# Altium PCB Main.PcbDoc (part 1 of 2)
Units mm, origin at the board's own origin, x right, y up, seen from the top; angles counter-clockwise.
Board outline 184.78 x 184.78 mm, 2 copper layers (Top Layer, Bottom Layer); 86 components, 58 nets, 400 pads, 1067 vias.
Unrouted connection lines stored in the file: 51.
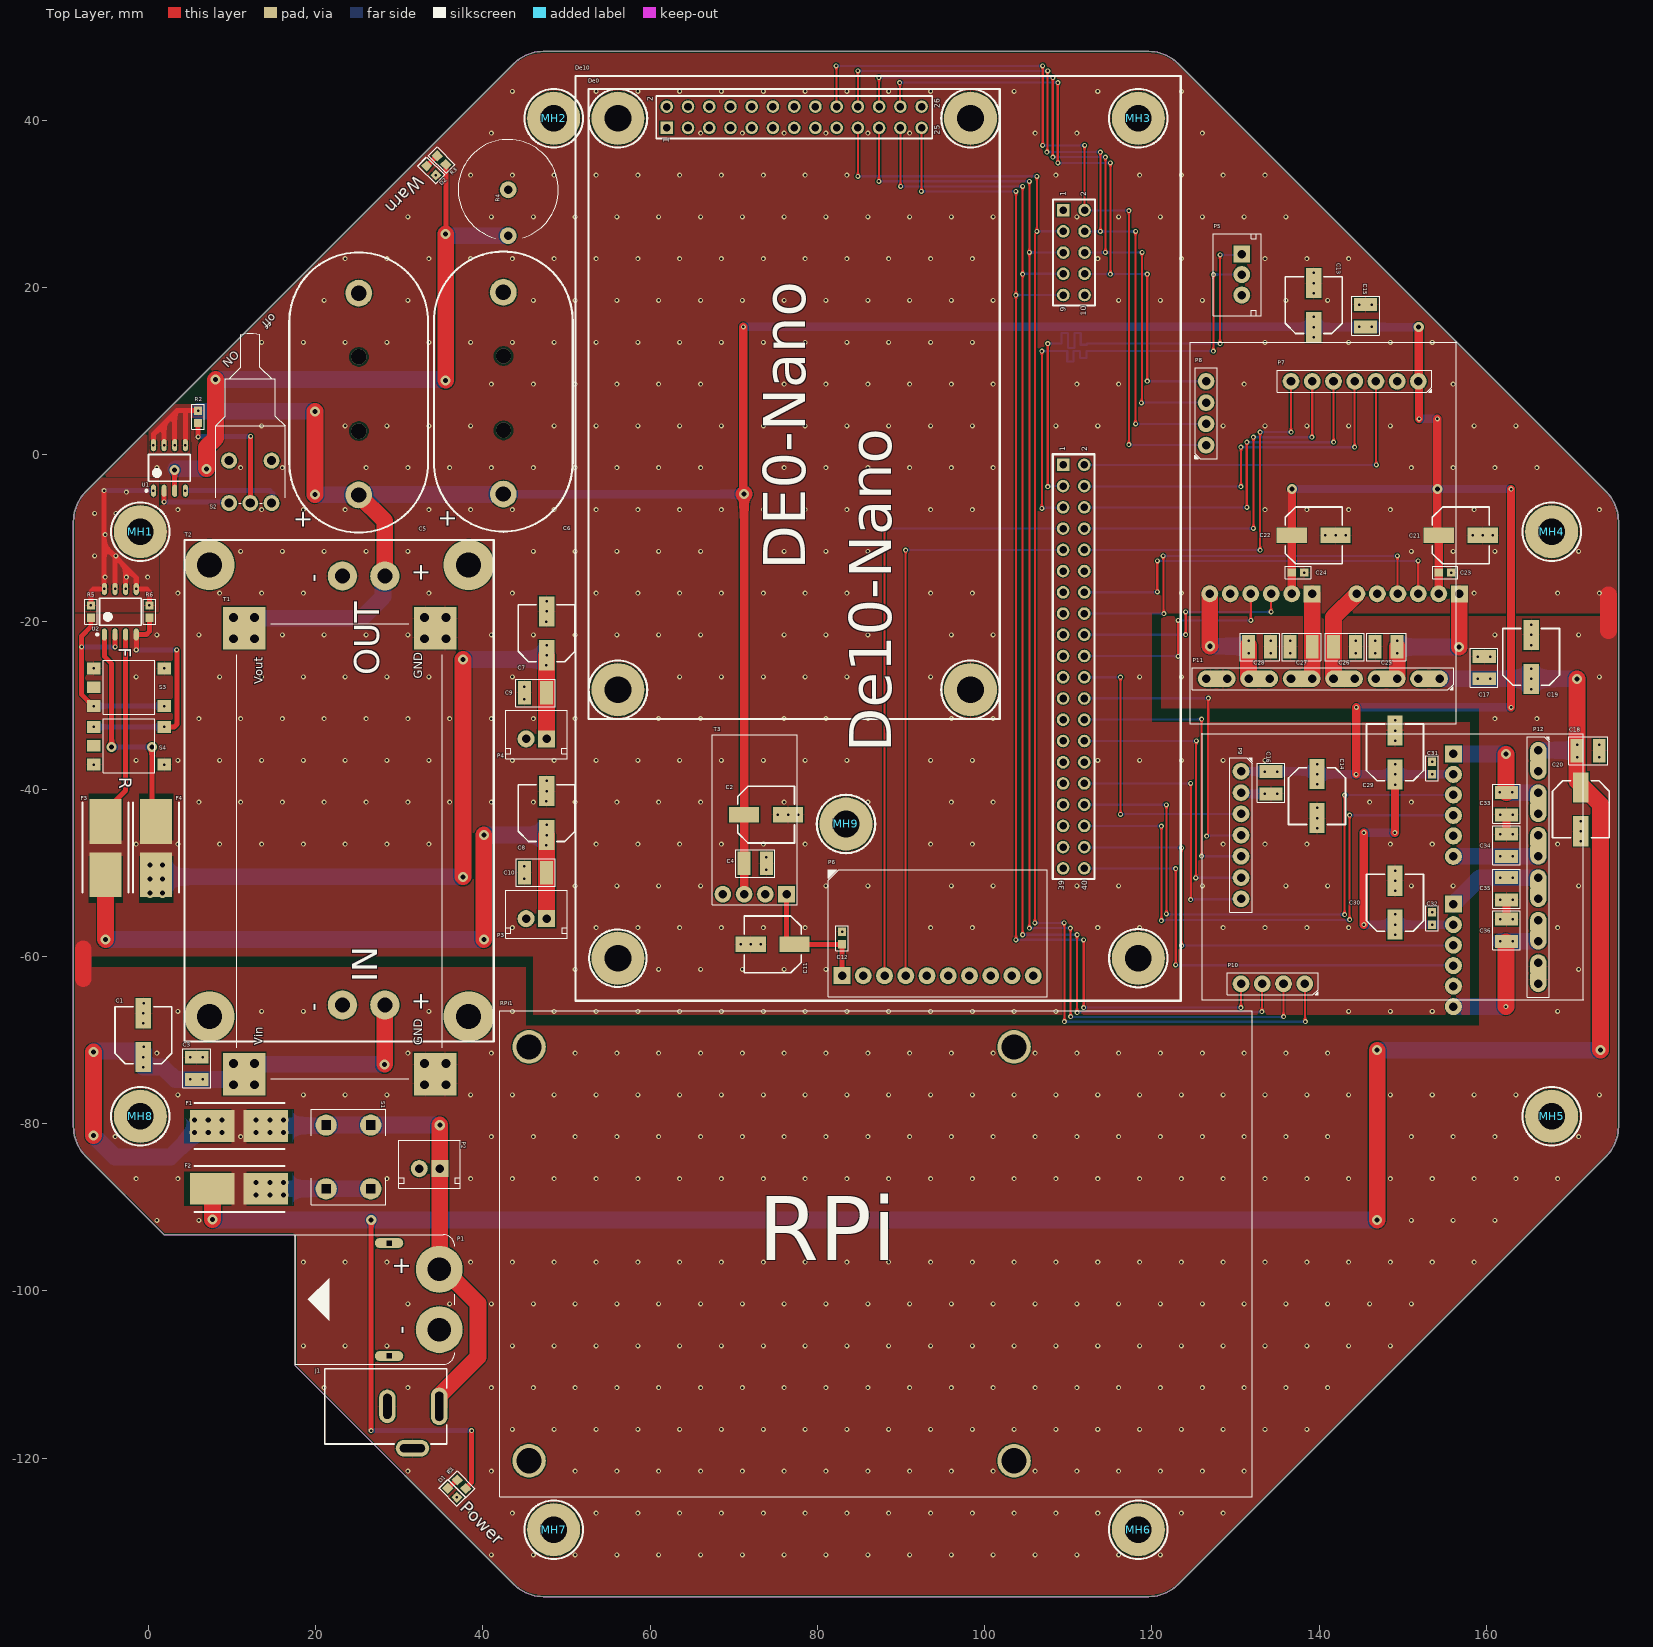
[diagram p0: Top Layer view]
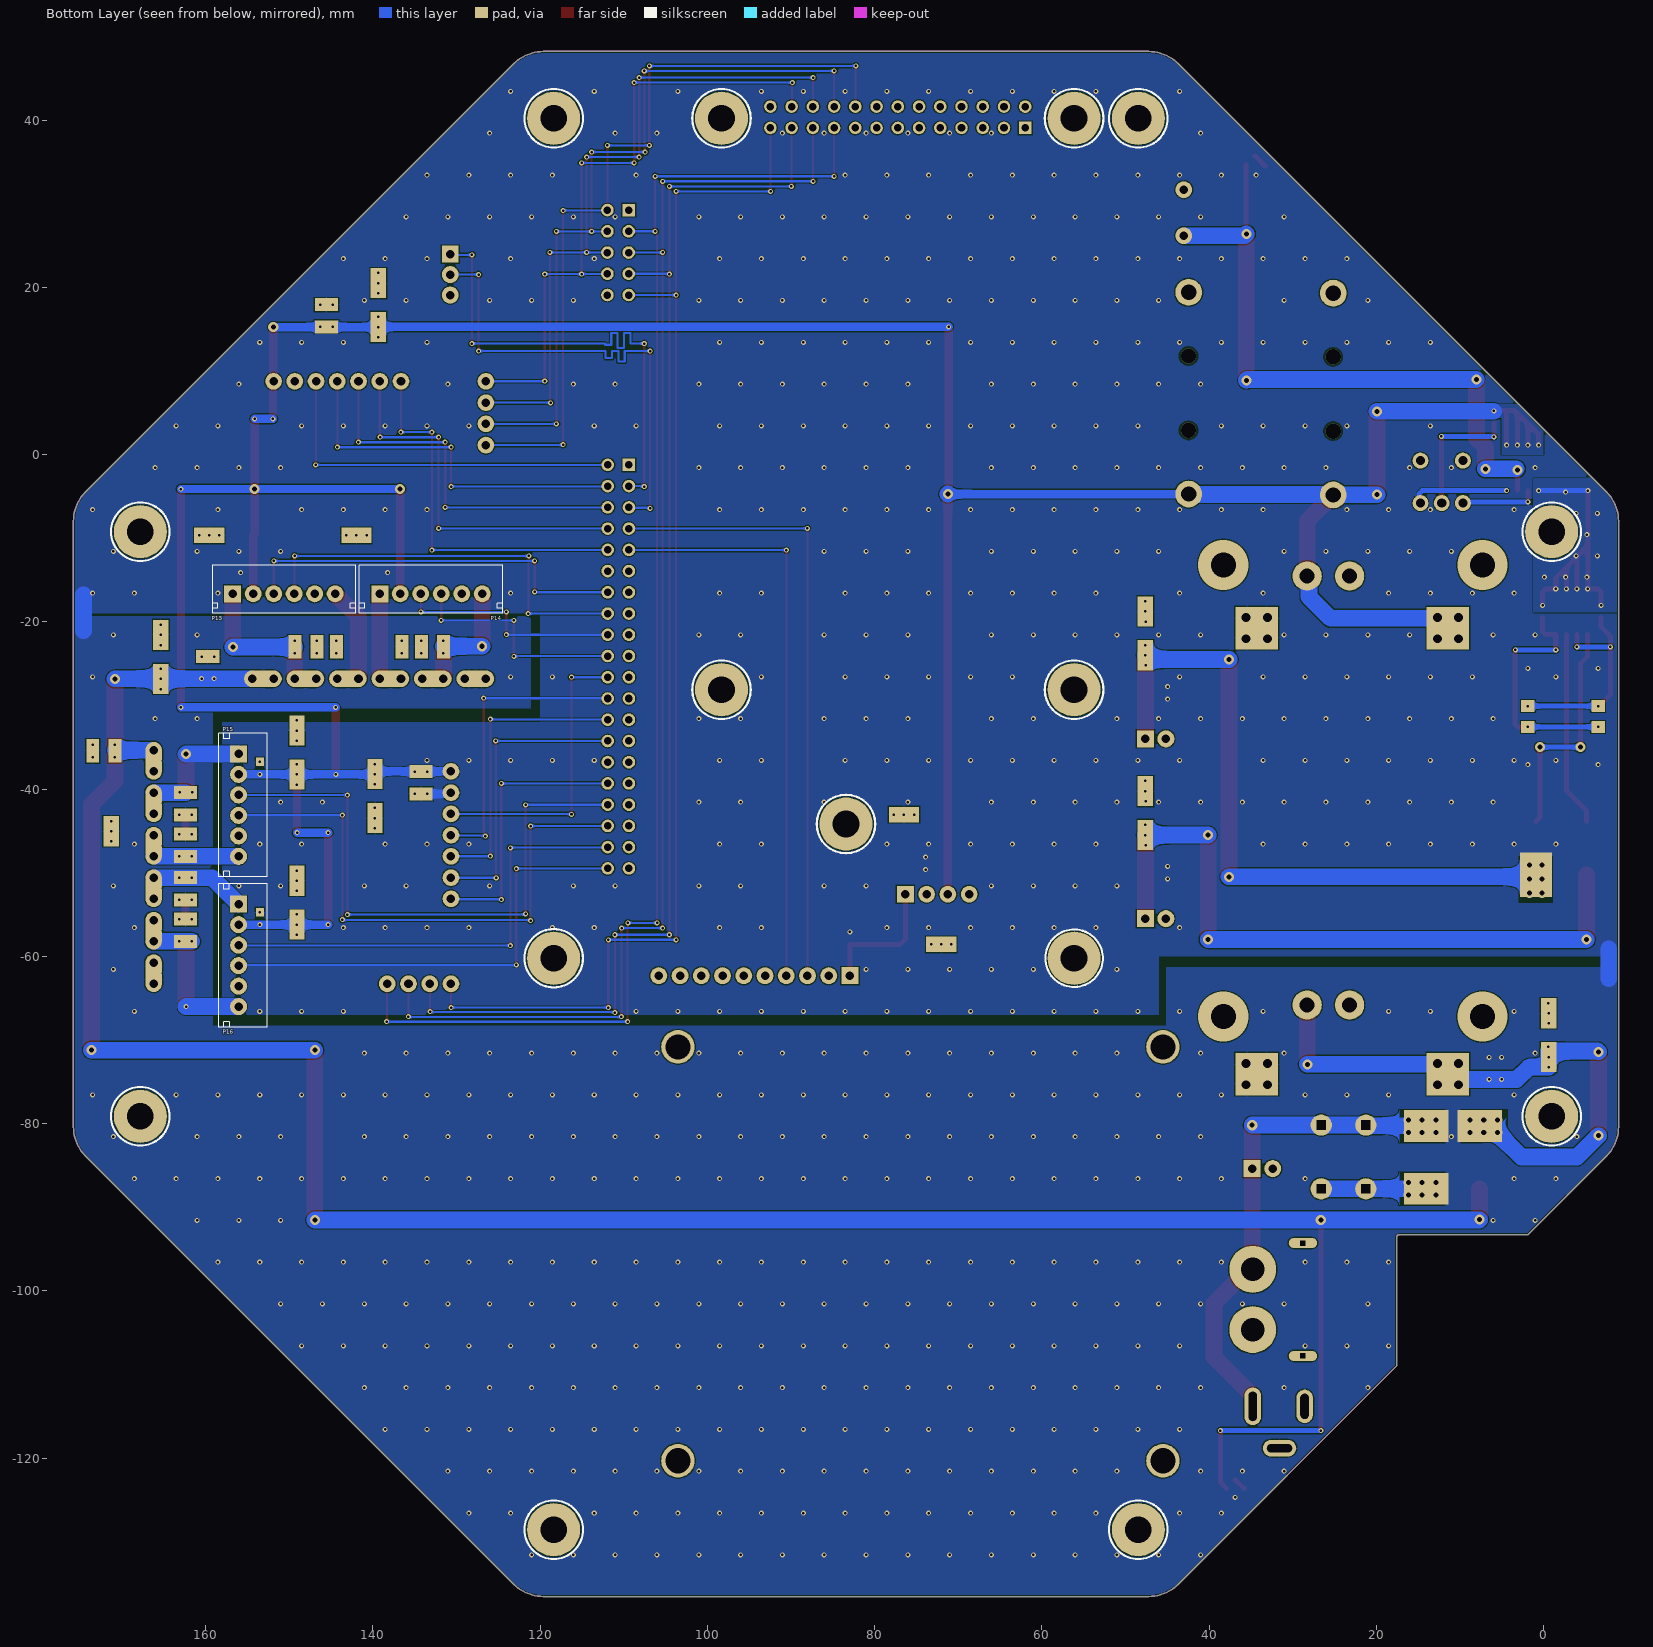
[diagram p1: Bottom Layer view, seen from below]
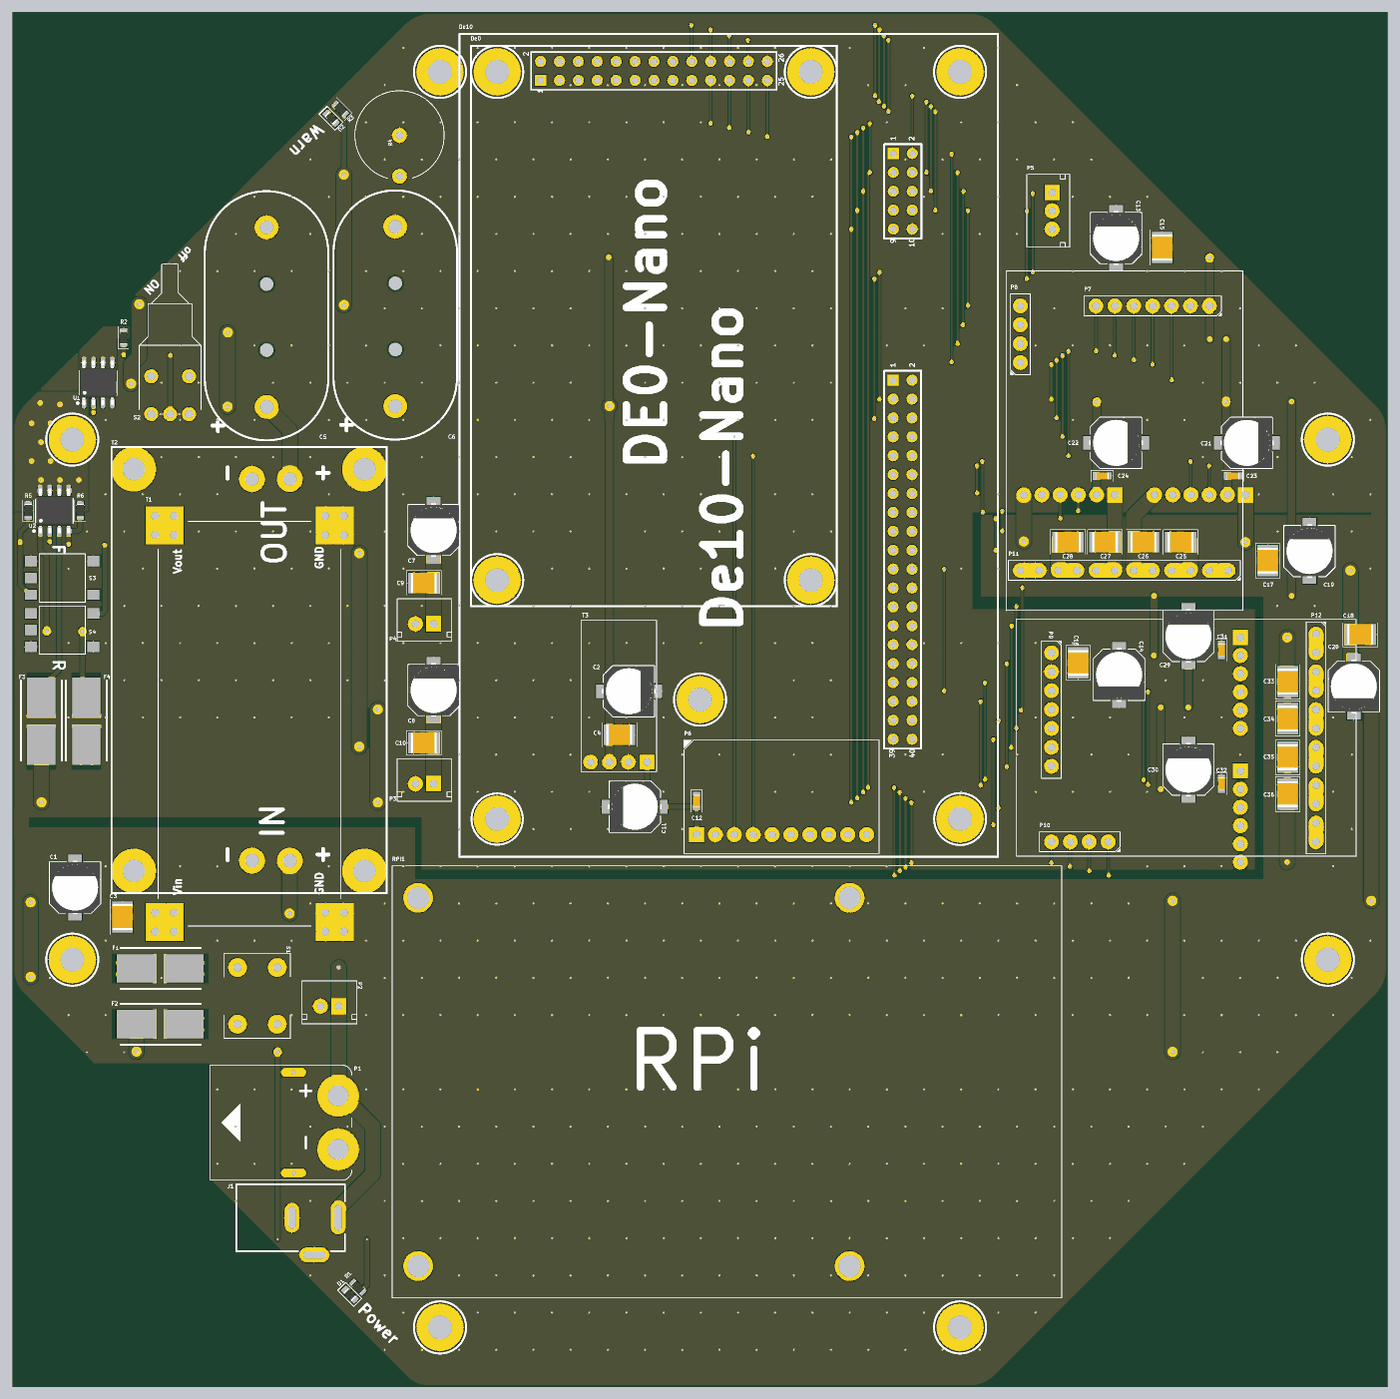
[diagram p3: 3D render of the assembled board from above, using the file's embedded part models]

## Layer stack, top to bottom
Top Solder: solder mask 0.0102, Solder Resist, Dk 3.5
Top Layer: signal copper 0.0356
Dielectric 1: dielectric 0.32, FR-4, Dk 4.8
Bottom Layer: signal copper 0.0356
Bottom Solder: solder mask 0.0102, Solder Resist, Dk 3.5

## Board outline
1.867,-93.289 17.242,-93.289 cw(c17.242,-93.614) 17.567,-93.614 17.567,-108.995 43.676,-135.104 ccw(c47.212,-131.569) 47.212,-136.569 119.607,-136.569 ccw(c119.607,-131.569) 123.142,-135.104 174.333,-83.914 ccw(c170.797,-80.378) 175.797,-80.378 175.797,-7.983 ccw(c170.797,-7.983) 174.333,-4.448 123.142,46.743 ccw(c119.607,43.207) 119.607,48.207 47.212,48.207 ccw(c47.212,43.207) 43.676,46.743 -7.514,-4.448 ccw(c-3.979,-7.983) -8.979,-7.983 -8.979,-80.378 ccw(c-3.979,-80.378) -7.514,-83.914

## Design rules (kind name [scope] priority, off if disabled: settings)
BoardOutlineClearance [All] p1: gap=0.2 ignorepadtopadclearanceinfootprint=FALSE
Clearance [All] p1: gap=0.127 ignorepadtopadclearanceinfootprint=FALSE except(0.25: Arc-Hole Track-Hole SMDPad-Hole THPad-Hole Via-Hole Fill-Hole Poly-Hole Region-Hole Text-Hole)
ComponentClearance [All] p1 off: gap=0.127 collisioncheckmode=3 verticalgap=0.127 showdistances=TRUE
DiffPairsRouting [All] p1: maxlimit=0.254 minlimit=0.127 mostfreqgap=0.127 toplayer_minwidth=0.127 toplayer_maxwidth=25.4 toplayer_prefwidth=0.127 bottomlayer_minwidth=0.127 bottomlayer_maxwidth=25.4 bottomlayer_prefwidth=0.127 maxuncoupledlength=12.7
Height [All] p1: minheight=0 maxheight=1816.048 prefheight=12.7
HoleSize [All] p1: absolutevalues=TRUE maxlimit=6.3 minlimit=0.3 maxpercent=80.000 minpercent=20.000
HoleToHoleClearance [All] p1: gap=0.25 allowstackedmicrovias=FALSE
Length "Schematic Length Constraint" [InNet('UART_RX')] p1: maxlimit=61 minlimit=60
Length [InNetClass('UART')] p2: maxlimit=60.1 minlimit=60
MinimumAnnularRing [All] p1: minimumring=0.076
MinimumSolderMaskSliver [All] p1: minsoldermaskwidth=0
PlaneClearance [All] p1: clearance=0.127
PlaneConnect PlaneConnectPowerPads [InPadClass('PowerPads')] p1: planeconnectstyle=Direct reliefexpansion=0.508 reliefentries=4 reliefconductorwidth=0.254 reliefairgap=0.254
PlaneConnect [All] p2: pad.planeconnectstyle=Relief pad.reliefexpansion=0.3 pad.reliefentries=4 pad.reliefconductorwidth=0.127 pad.reliefairgap=0.127 via.planeconnectstyle=Direct via.reliefexpansion=0.3 via.reliefentries=4 via.reliefconductorwidth=0.127 via.reliefairgap=0.127
PolygonConnect PolygonConnectPowerPads [All vs (InPadClass('PowerPads'))] p1: connectstyle=Direct reliefconductorwidth=0.254 reliefentries=4 polygonreliefangle="90 Angle" airgapwidth=0.254
PolygonConnect [All] p2: thpad.connectstyle=Relief thpad.reliefconductorwidth=0.127 thpad.reliefentries=4 thpad.polygonreliefangle="90 Angle" thpad.airgapwidth=0.127 smdpad.connectstyle=Relief smdpad.reliefconductorwidth=0.127 smdpad.reliefentries=4 smdpad.polygonreliefangle="90 Angle" smdpad.airgapwidth=0.127 via.connectstyle=Direct via.reliefconductorwidth=0.127 via.reliefentries=4 via.polygonreliefangle="90 Angle" via.airgapwidth=0.127
RoutingVias [All] p1: holewidth=0.3 width=0.6 viastyle="Through Hole" minholewidth=0.3 minwidth=0.6 maxholewidth=0.6 maxwidth=6.6
SilkToSilkClearance [All] p1: silktosilkclearance=0
SilkToSolderMaskClearance [IsPad] p1 off: minsilkscreentomaskgap=0.127 clearancetoexposedcopper=TRUE
SolderMaskExpansion [All] p1: expansion=0.075 istentingtop=FALSE
Width [All] p1: maxlimit=25.4 minlimit=0.127 preferedwidth=0.127 minimp=50.000000 maximp=50.000000 favimp=50.000000
20 further rules are at their usual default settings.

## Classes and differential pairs
net class UART: UART_RX UART_TX
component class Power: C1 C2 C3 C4 C5 C6 C7 C8 C9 C10 D1 D2 F1 F2 F3 F4 J1 MH1 MH2 MH3 MH4 MH5 MH6 MH7 MH8 MH9 P1 P2 P3 P4 R1 R2 R3 R4 R5 R6 S1 S2 S3 S4 T1 T2 T3 U1 U2
component class Motor: C13 C14 C15 C16 C17 C18 C19 C20 C21 C22 C23 C24 C25 C26 C27 C28 C29 C30 C31 C32 C33 C34 C35 C36 P7 P8 P9 P10 P11 P12 P13 P14 P15 P16
component class IOandCommunication: C11 C12 De0 De10 P5 P6 RPi1

## Components (designator, comment, footprint, x,y, rotation, side; value= is the part's Value field where it differs from the comment)
C1 "220uF" VZT221M1ETR-0607 -0.603,-69.434 r90 top
C2 "220uF" VZT221M1ETR-0607 73.85,-43.05 r0 top
C3 "0.1uF" 1210B104K500NT 5.765,-73.4 r270 top
C4 "0.1uF" 1210B104K500NT 72.55,-48.892 r180 top
C5 "10F" SUPPYCAP-DIP_L33.0_W16.5 25.135,-1.025 r90 top
C6 "10F" SUPPYCAP-DIP_L33.0_W16.5 42.435,-0.925 r90 top
C7 "220uF" VZT221M1ETR-0607 47.6,-21.375 r90 top
C8 "220uF" VZT221M1ETR-0607 47.6,-42.875 r90 top
C9 "0.1uF" 1210B104K500NT 46.275,-28.5 r0 top
C10 "0.1uF" 1210B104K500NT 46.275,-50 r0 top
C11 "220uF" VZT221M1ETR-0607 74.64,-58.575 r180 top
C12 "0.1uF" CL10B104KA8NNNC 82.935,-57.825 r270 top
C13 "220uF" VZT221M1ETR-0607 139.335,17.875 r90 top
C14 "220uF" VZT221M1ETR-0607 139.735,-40.85 r270 top
C15 "0.1uF" 1210B104K500NT 145.535,16.6 r270 top
C16 "0.1uF" 1210B104K500NT 134.235,-39.25 r90 top
C17 "0.1uF" 1210B104K500NT 159.715,-25.485 r270 top
C18 "0.1uF" 1210B104K500NT 172.16,-35.425 r180 top
C19 "220uF" VZT221M1ETR-0607 165.335,-24.2 r90 top
C20 "220uF" VZT221M1ETR-0607 171.287,-42.423 r270 top
C21 "220uF" VZT221M1ETR-0607 156.924,-9.665 r0 top
C22 "220uF" VZT221M1ETR-0607 139.34,-9.665 r0 top
C23 "0.1uF" CL10B104KA8NNNC 155.049,-14.11 r180 top
C24 "0.1uF" CL10B104KA8NNNC 137.465,-14.11 r180 top
C25 "0.1uF" 1210B104K500NT 148,-23 r180 top
C26 "0.1uF" 1210B104K500NT 143.03,-23 r180 top
C27 "0.1uF" 1210B104K500NT 137.84,-23 r180 top
C28 "0.1uF" 1210B104K500NT 132.87,-23 r180 top
C29 "220uF" VZT221M1ETR-0607 149.062,-35.628 r90 top
C30 "220uF" VZT221M1ETR-0607 149.062,-53.593 r90 top
C31 "0.1uF" CL10B104KA8NNNC 153.507,-37.503 r270 top
C32 "0.1uF" CL10B104KA8NNNC 153.507,-55.468 r270 top
C33 "0.1uF" 1210B104K500NT 162.397,-41.758 r270 top
C34 "0.1uF" 1210B104K500NT 162.397,-46.728 r270 top
C35 "0.1uF" 1210B104K500NT 162.397,-51.918 r270 top
C36 "0.1uF" 1210B104K500NT 162.397,-56.888 r270 top
D1 "LED(G)" BL-HG036D-AV-TRB 35.802,-122.572 r315 top
D2 "LED(G)" BL-HG036D-AV-TRB 33.278,35.559 r315 top
De0 "DE0-Nano" DE0-NANO 93.726,40.334 r90 top locked
De10 "De10-Nano" DE10-NANO 110.664,19.077 r90 top locked
F1 "5A Fuse Holder" "SMD FUSES HOLDER" 10.827,-80.314 r180 top
F2 "10A Fuse Holder" "SMD FUSES HOLDER" 10.827,-87.807 r180 top
F3 "4A Fuse Holder" "SMD FUSES HOLDER" -5.135,-47.075 r270 top
F4 "4A Fuse Holder" "SMD FUSES HOLDER" 0.915,-47.075 r270 top
J1 "DC-005-T25" DC-005-T25 26.66,-114.73 r0 top
MH1 "M3 Hole" "M3 HOLE" -0.979,-9.226 r0 top locked
MH2 "M3 Hole" "M3 HOLE" 48.455,40.207 r0 top
MH3 "M3 Hole" "M3 HOLE" 118.364,40.207 r0 top
MH4 "M3 Hole" "M3 HOLE" 167.797,-9.226 r0 top
MH5 "M3 Hole" "M3 HOLE" 167.797,-79.135 r0 top
MH6 "M3 Hole" "M3 HOLE" 118.364,-128.569 r0 top
MH7 "M3 Hole" "M3 HOLE" 48.455,-128.569 r0 top
MH8 "M3 Hole" "M3 HOLE" -0.979,-79.135 r0 top
MH9 "M3 Hole" "M3 HOLE" 83.409,-44.181 r0 top
P1 "Header 2" XT60PW-F 31.767,-101.039 r90 top
P2 "Header 2" B2B-XH-A(LF)(SN) 37.28,-81.994 r180 top
P3 "Header 2" B2B-XH-A(LF)(SN) 50.05,-52.1 r180 top
P4 "Header 2" B2B-XH-A(LF)(SN) 50.05,-30.6 r180 top
P5 "Header 3" B3B-XH-A(LF)(SN) 131.61,25.075 r270 top
P6 "MPU9250" MPU9250 81.265,-49.625 r90 top
P7 "Header 7" KH-2.54FH-1X7P-H8.5 132.465,8.75 r180 top
P8 "Header 4" KH-2.54FH-1X4P-H8.5 126.465,10.37 r90 top
P9 "Header 7" KH-2.54FH-1X7P-H8.5 130.647,-57.293 r270 top
P10 "Header 4" KH-2.54FH-1X4P-H8.5 129.027,-63.293 r180 top
P11 "Header 12" "KH-2.54FH-1X12P-H8.5 (PAD LINKED)" 154.405,-26.81 r180 top
P12 "Header 12" "KH-2.54FH-1X12P-H8.5 (PAD LINKED)" 166.207,-35.353 r270 top
P13 "Header 6" B6B-XH-A(LF)(SN) 156.749,-16.65 r180 bottom
P14 "Header 6" B6B-XH-A(LF)(SN) 139.165,-16.65 r180 bottom
P15 "Header 6" B6B-XH-A(LF)(SN) 156.047,-35.803 r270 bottom
P16 "Header 6" B6B-XH-A(LF)(SN) 156.047,-53.768 r270 bottom
R1 "150k" RS-03K1503FT 37.428,-123.138 r315 top
R2 "1k" RS-03K1503FT 5.935,4.5 r90 top
R3 "150k" RS-03K1503FT 35.045,35.205 r315 top
R4 "12" MOF3WS-12Ω±5%T 43.015,31.675 r270 top
R5 "1k" RS-03K1503FT -6.9,-18.775 r90 top
R6 "1k" RS-03K1503FT 0.1,-18.775 r90 top
RPi1 "Rasbperry PI 4" "RASPBERRY PI 4" 74.515,-95.575 r180 top
S1 "Motor EMS" JNQ032 26.575,-87.807 r270 top
S2 "Digital EMS" ST-0-102-C03-N003-RS 12.175,9.045 r270 top
S3 "FPGA_Re" SKHMQLE010 -2.335,-27.825 r180 top
S4 "RPi_Re" SKHMQKE010 -2.335,-34.825 r180 top
T1 "XL4015 Module" "XL4015 VOLTAGE REGULATOR MODULE" 12.695,-72.825 r90 top locked
T2 "XL4016 Module" "XH-M401 VOLTAGE REGULATOR MODULE" 26.365,9.375 r90 top locked
T3 "3P3 Voltage regulator" "SMALL VOLTAGE REGULATOR MODULE" 77.575,-53.845 r180 top
U1 "HSM3214" HSM3214 2.5,-1.6 r90 top
U2 "HSM3214" HSM3214 -3.37,-18.8 r90 top

## Footprints (in the part's own frame and the unit in brackets; to place one, negate y for a bottom-side part, rotate by r counter-clockwise, add the part's x,y. Pads: shape width x height; smd on the part's side, far side on the other; paste and mask are expansions set on the pad)
1210B104K500NT [mm] "50V 100nF X7R ±10% 1210  Multilayer Ceramic Capacitors MLCC - SMD/SMT ROHS"
  rect 1.55x2.8 smd: 1(-1.325,0) 2(1.325,0)
  silkscreen extent -2.35,-1.65 2.35,1.65, body extent -1.75,-1.4 1.75,1.4, height 2.8
B2B-XH-A(LF)(SN) [mil] "1x2P XH Header, Top Vesion"
  rect 80x80 hole 40: 1(96.46,133.86)
  round 80 hole 40: 2(192.91,133.86)
  silkscreen extent 0,0 289,226
B3B-XH-A(LF)(SN) [mil] "1x3P XH Header, Top Vesion"
  rect 80x80 hole 40: 1(43.31,-34.45)
  round 80 hole 40: 2(139.76,-34.45) 3(236.22,-34.45)
  silkscreen extent -53,-168 333,58
B6B-XH-A(LF)(SN) [mil] "1x6P XH 1 2.5mm 6 Brass Plugin,P=2.5mm  Wire To Board / Wire To Wire Connector ROHS"
  rect 80x80 hole 40: 1(0,0)
  round 80 hole 40: 2(96.46,0) 3(192.91,0) 4(289.37,0) 5(385.83,0) 6(482.28,0)
  silkscreen extent -96,-93 579,134
BL-HG036D-AV-TRB [mm] "0603 SMD LED(G)"
  rect 0.95x0.95 smd: 1(0.725,-0.75) 2(2.275,-0.75)
  silkscreen extent -0.06,-1.5 3,0, body extent 0.65,-1.2 2.35,-0.3, height 0.9
CL10B104KA8NNNC [mm] "0603 25V 100nF MLCC"
  rect 1x0.95 smd: 1(-0.75,0) 2(0.75,0)
  silkscreen extent -1.5,-0.75 1.5,0.75, body extent -0.85,-0.45 0.85,0.45, height 0.55
DC-005-T25 [mm] "30V 3A 2.5mm Power Connector"
  oval 2x4.5 hole 1 slot 3.5 at 90 deg: 1(8.105,0.905)
  oval 2x4 hole 1 slot 3 at 90 deg: 2(1.905,0.905)
  oval 4x2 hole 1 slot 3 at 0 deg: 3(4.905,-4.095)
  silkscreen extent -5.6,-3.6 9.01,5.41
DE0-NANO [mm]
  round 6.35 hole 3.2: 0(-68.453,-4.572) 0(-68.453,37.592) 0(-0.127,-4.572) 0(-0.127,37.592)
  rect 1.5x1.5 hole 0.9: 1(-1.27,31.75)
  round 1.5 hole 0.9: 2(1.27,31.75) 3(-1.27,29.21) 4(1.27,29.21) 5(-1.27,26.67) 6(1.27,26.67) 7(-1.27,24.13) 8(1.27,24.13) 9(-1.27,21.59) 10(1.27,21.59) 11(-1.27,19.05) 12(1.27,19.05) 13(-1.27,16.51) 14(1.27,16.51) 15(-1.27,13.97) 16(1.27,13.97) 17(-1.27,11.43) 18(1.27,11.43) 19(-1.27,8.89) 20(1.27,8.89) 21(-1.27,6.35) 22(1.27,6.35) 23(-1.27,3.81) 24(1.27,3.81) 25(-1.27,1.27) 26(1.27,1.27)
  silkscreen extent -71.96,-8.08 3.38,41.1
DE10-NANO [mm]
  round 6.35 hole 3.2: 0(-79.31,-7.7) 0(-79.31,54.53) 0(21.13,54.53) 0(21.13,-7.7)
  rect 1.5x1.5 hole 0.9: 1(10.16,1.27) 11(-20.31,1.3)
  round 1.5 hole 0.9: 2(10.16,-1.27) 3(7.62,1.27) 4(7.62,-1.27) 5(5.08,1.27) 6(5.08,-1.27) 7(2.54,1.27) 8(2.54,-1.27) 9(0,1.27) 10(0,-1.27) 12(-20.31,-1.24) 13(-22.85,1.3) 14(-22.85,-1.24) 15(-25.39,1.3) 16(-25.39,-1.24) 17(-27.93,1.3) 18(-27.93,-1.24) 19(-30.47,1.3) 20(-30.47,-1.24) 21(-33.01,1.3) 22(-33.01,-1.24) 23(-35.55,1.3) 24(-35.55,-1.24) 25(-38.09,1.3) 26(-38.09,-1.24) 27(-40.63,1.3) 28(-40.63,-1.24) 29(-43.17,1.3) 30(-43.17,-1.24) 31(-45.71,1.3) 32(-45.71,-1.24) 33(-48.25,1.3) 34(-48.25,-1.24) 35(-50.79,1.3) 36(-50.79,-1.24) 37(-53.33,1.3) 38(-53.33,-1.24) 39(-55.87,1.3) 40(-55.87,-1.24) 41(-58.41,1.3) 42(-58.41,-1.24) 43(-60.95,1.3) 44(-60.95,-1.24) 45(-63.49,1.3) 46(-63.49,-1.24) 47(-66.03,1.3) 48(-66.03,-1.24) 49(-68.57,1.3) 50(-68.57,-1.24)
  silkscreen extent -84.39,-12.78 26.21,59.61
HSM3214 [mm] "30V 10A 12mΩ@10V,8A 1.5W 2.5V@250μA 2 N-Channel SOP-8  MOSFETs ROHS"
  oval 1.45x0.6 smd: 1(-2.725,1.905) 2(-2.725,0.635) 3(-2.725,-0.635) 4(-2.725,-1.905) 5(2.725,-1.905) 6(2.725,-0.635) 7(2.725,0.635) 8(2.725,1.905)
  silkscreen extent -2.85,-2.5 1.6,2.88, body extent -3,-2.5 3,2.5, height 1.75
JNQ032 [mm] "30A 4.8mm Short Connection"
  round 2.54 hole 1.1 square: 1(-7.62,0) 1(-7.62,-5.334) 2(0,0) 2(0,-5.334)
  silkscreen extent -9.53,-7.11 1.91,1.78, body extent -9.14,-6.86 1.52,1.52, height 8.8
KH-2.54FH-1X4P-H8.5 [mm] "1x4P Female Headers"
  round 2 hole 1.02: 1(-9.24,0) 2(-6.7,0) 3(-4.16,0) 4(-1.62,0)
  silkscreen extent -10.86,-1.33 0,1.33, body extent -10.89,-1.34 0,1.32, height 8.65
KH-2.54FH-1X7P-H8.5 [mm] "1x7P Female Headers"
  round 2 hole 1.02: 1(-19.4,0) 2(-16.86,0) 3(-14.32,0) 4(-11.78,0) 5(-9.24,0) 6(-6.7,0) 7(-4.16,0)
  silkscreen extent -21.02,-1.33 -2.54,1.33, body extent -21.05,-1.34 -2.54,1.32, height 8.65
"KH-2.54FH-1X12P-H8.5 (PAD LINKED)" [mm] "Two Pad Linked, 1x12P Female Headers"
  oval 3x2 hole 1.02 copper offset 0.51,0: 1(0,0) 3(5.08,0) 5(10.16,0) 7(15.24,0) 9(20.32,0) 11(25.4,0)
  oval 3x2 hole 1.02 copper offset -0.51,0: 2(2.54,0) 4(7.62,0) 6(12.7,0) 8(17.78,0) 10(22.86,0) 12(27.94,0)
  silkscreen extent -1.62,-1.33 29.56,1.33, body extent -1.65,-1.34 29.56,1.33, height 8.65
"M3 HOLE" [mm] "M3 Hole"
  round 6.35 hole 3.2: 1(0,0)
  silkscreen extent -3.5,-3.5 3.5,3.5
MOF3WS-12Ω±5%T [mm] "12Ω 3W Resistor"
  round 2 hole 1: 1(0,0) 2(5.5,0)
  silkscreen extent -6,-6 5.79,6
MPU9250 [mil] "MPU9250"
  rect 80x80 hole 40: 1(-500,-65.75)
  round 80 hole 40: 2(-500,-165.75) 3(-500,-265.75) 4(-500,-365.75) 5(-500,-465.75) 6(-500,-565.75) 7(-500,-665.75) 8(-500,-765.75) 9(-500,-865.75) 10(-500,-965.75)
  silkscreen extent -600,-1031 0,0, body extent -560,-1031 -440,0, height 358
"RASPBERRY PI 4" [mm]
  round 4 hole 3: 1(-29,24.75) 1(-29,-24.75) 1(29,24.75) 1(29,-24.75)
  silkscreen extent -57.5,-29.05 32.5,29.05
RS-03K1503FT [mm] "0603 150k 1/10w Resistor"
  rect 1x0.95 smd: 1(-0.725,0) 2(0.725,0)
  silkscreen extent -1.5,-0.75 1.5,0.75, body extent -0.87,-0.47 0.87,0.47, height 0.5
SKHMQKE010 [mm] "6.2mm 3.1mm Round Button 50mA Brick nogging 6.5mm SPST 12V SMD  Tactile Switches ROHS"
  rect 1.6x1.4 smd: 1(-4.2,2.25) 1(4.2,2.25) 2(-4.2,-2.25) 2(4.2,-2.25) 3(4.2,0)
  silkscreen extent -3.1,-3.25 3.1,3.25, body extent -3.1,-3.25 3.1,3.25, height 3.1
SKHMQLE010 [mm] "6.2mm 3.1mm Round Button 50mA Brick nogging 6.5mm SPST 12V SMD  Tactile Switches ROHS"
  rect 1.6x1.4 smd: 1(-4.2,2.25) 1(4.2,2.25) 2(-4.2,-2.25) 2(4.2,-2.25) 3(4.2,0)
  silkscreen extent -3.1,-3.25 3.1,3.25, body extent -3.1,-3.25 3.1,3.25, height 3.1
"SMALL VOLTAGE REGULATOR MODULE" [mm] "3A DC-DC Non-isolated voltage regulator module"
  round 2 hole 1.02: 1(6.35,-1.27) 2(3.81,-1.27) 4(8.89,-1.27)
  rect 2x2 hole 1.02: 3(1.27,-1.27)
  silkscreen extent 0,-20.32 10.16,0, body extent -0.35,-2.61 10.51,0.04, height 8.65
"SMD FUSES HOLDER" [mil] "SMD 1808 Fuse Holder"
  rect 210x150 smd: 1(-125.5,0) 2(125.5,0)
  silkscreen extent -214,-108 209,108, body extent -214,-108 209,108, height 150
ST-0-102-C03-N003-RS [mm] "SW-SPST"
  round 1.9 hole 1.1: 1(14.85,2.54) 2(14.85,0) 3(14.85,-2.54) 4(9.77,-2.54) 4(9.77,2.54)
  silkscreen extent -5.4,-4.15 14.85,4.15
SUPPYCAP-DIP_L33.0_W16.5 [mm] "478-11288-ND * 2"
  round 3.2 hole 1.83: 1(-3.802,0) 2(20.328,0)
  silkscreen extent -8.3,-8.3 25.2,8.3
VZT221M1ETR-0607 [mm] "SMD 6.3x7.7mm 220uF 25V Capacitor"
  rect 3.6x1.85 smd: 1(-2.625,0) 2(2.625,0)
  silkscreen extent -3.4,-3.4 3.4,3.4, body extent -3.6,-3.4 3.6,3.4, height 8
"XH-M401 VOLTAGE REGULATOR MODULE" [mm] "8A DC-DC Non-isolated voltage regulator module"
  round 3.5 hole 1.8: 1(-75.2,-1.9) 2(-75.2,3.18) 3(-23.9,-1.9) 4(-23.9,3.18)
  silkscreen extent -79.58,-14.92 -19.58,22.08
"XL4015 VOLTAGE REGULATOR MODULE" [mm] "5A DC-DC Non-isolated voltage regulator module"
  rect 2.74x2.74 hole 1.06 copper offset 0.1,0.1: 1(-2.54,0) 2(-2.54,-22.86) 3(50.8,0) 4(50.8,-22.86)
  rect 2.74x2.74 hole 1.06 copper offset 0.1,-0.1: 1(-2.54,2.54) 2(-2.54,-20.32) 3(50.8,2.54) 4(50.8,-20.32)
  rect 2.74x2.74 hole 1.06 copper offset -0.1,-0.1: 1(0,2.54) 2(0,-20.32) 3(53.34,2.54) 4(53.34,-20.32)
  rect 2.74x2.74 hole 1.06 copper offset -0.1,0.1: 1(0,0) 2(0,-22.86) 3(53.34,0) 4(53.34,-22.86)
  silkscreen extent -1.8,-22.46 52.6,2.14, body extent -3.81,-24.13 54.61,3.81, height 8.8
XT60PW-F [mm] "500V 45A XT Connector"
  round 5.6 hole 2.8: 1(3.6,-3) 2(-3.6,-3)
  oval 1.2x3.4 hole 0.6 square: 3(-6.75,3) 3(6.75,3)
  silkscreen extent -7.75,-4.85 7.75,14.2, body extent -7.75,-4.85 7.75,14.2, height 8.4

## Part data
C1 C2 C7 C8 C11 C13 C14 C19 C20 C21 C22 C29 C30: library part "Cap Pol1", "-45℃~+105℃ 2000hrs@105℃ 220uF 7.7mm 25V 6.3mm ±20% SMD,6.3x7.7mm  Aluminum Electrolytic Capacitors - SMD ROHS", LatestRevisionDate=17-Jul-2002, LatestRevisionNote="Re-released for DXP Platform.", PackageDescription="Polarized Capacitor (Radial); 2 Leads", PackageReference=RB7.6-15, Published=8-Jun-2000, Publisher="Altium Limited"
C3 C4 C9 C10 C15 C16 C17 C18 C25 C26 C27 C28 C33 C34 C35 C36: library part "Cap Semi", "50V 100nF X7R ±10% 1210  Multilayer Ceramic Capacitors MLCC - SMD/SMT ROHS", LatestRevisionDate=29-May-2009, LatestRevisionNote="IPC-7351 Footprint Added.", PackageDescription="Chip Capacitor", PackageReference=C1206, Published=8-Jun-2000, Publisher="Altium Limited"
C5 C6: library part "Cap Pol1", "CAPACITOR 10F -10% +30% 5.5V T/H", LatestRevisionDate=17-Jul-2002, LatestRevisionNote="Re-released for DXP Platform.", PackageDescription="Polarized Capacitor (Radial); 2 Leads", PackageReference=RB7.6-15, Published=8-Jun-2000, Publisher="Altium Limited"
C12 C23 C24 C31 C32: library part "Cap Semi", "25V 100nF X7R ±10% 0603  Multilayer Ceramic Capacitors MLCC - SMD/SMT ROHS", LatestRevisionDate=29-May-2009, LatestRevisionNote="IPC-7351 Footprint Added.", PackageDescription="Chip Capacitor", PackageReference=C1206, Published=8-Jun-2000, Publisher="Altium Limited"
D1 D2: library part LED0, "Green-yellow 0603 Light Emitting Diodes (LED) RoHS", LatestRevisionDate=08-Jul-2005, LatestRevisionNote="Mech Layer 1 removed.", PackageDescription="LED; 2 Leads", PackageReference=LED-0, Published=8-Jun-2000, Publisher="Altium Limited"
De0: library part De0-Nano
F1: library part "Fuse 1", "01550900M (Fuse Holder) / SMD,9.73x5.03mm Fuse Holders ROHS / ----- / 0451005.MRL (Fuse) / FastBlow 50A SMD Fuse 5A 5.566 12.5mΩ SMD  Fuses ROHS", LatestRevisionDate=17-Jul-2002, LatestRevisionNote="Re-released for DXP Platform.", PackageDescription="Thru-Hole; 2 Leads", PackageReference=PIN-W2/E2.8, Published=8-Jun-2000, Publisher="Altium Limited"
F2: library part "Fuse 1", "01550900M (Fuse Holder) / SMD,9.73x5.03mm Fuse Holders ROHS / ----- / 0451010.MRL (Fuse) / FastBlow 50A SMD Fuse 10A 26.46 5.6mΩ SMD  Fuses ROHS", LatestRevisionDate=17-Jul-2002, LatestRevisionNote="Re-released for DXP Platform.", PackageDescription="Thru-Hole; 2 Leads", PackageReference=PIN-W2/E2.8, Published=8-Jun-2000, Publisher="Altium Limited"
F3 F4: library part "Fuse 1", "01550900M (Fuse Holder) / SMD,9.73x5.03mm Fuse Holders ROHS / ----- / 0451004.MRL (Fuse) / FastBlow 50A SMD Fuse 4A 3.152 16mΩ SMD  Fuses ROHS", LatestRevisionDate=17-Jul-2002, LatestRevisionNote="Re-released for DXP Platform.", PackageDescription="Thru-Hole; 2 Leads", PackageReference=PIN-W2/E2.8, Published=8-Jun-2000, Publisher="Altium Limited"
J1: library part PWR2.5, "Shrouded DC Power Receptacle -10℃~+60℃ 2.5mm 6.3mm 3A 30V Plugin AC/DC Power Connectors ROHS", ComponentLink1Description="Manufacturer Link", ComponentLink1URL=http://domino.kycon.com/internet/Products.html, DatasheetDocument=09-May-2002, Published=17-Dec-2003, Publisher="Altium Limited"
MH1 MH2 MH3 MH4 MH5 MH6 MH7 MH8 MH9: library part M3_Hole
P1: "XT60PW-F 500V 45A Through Hole Power Connectors ROHS", LatestRevisionDate=17-Jul-2002, LatestRevisionNote="Re-released for DXP Platform.", Publisher="Altium Limited"
P2 P3 P4: "1x2P XH 1 2.5mm 2 Brass Plugin,P=2.5mm  Wire To Board / Wire To Wire Connector ROHS", LatestRevisionDate=17-Jul-2002, LatestRevisionNote="Re-released for DXP Platform.", Publisher="Altium Limited"
P5: "1x3P XH 1 2.5mm 3 Brass Plugin,P=2.5mm  Wire To Board / Wire To Wire Connector ROHS", LatestRevisionDate=17-Jul-2002, LatestRevisionNote="Re-released for DXP Platform.", Publisher="Altium Limited"
P6: "9DOF, 3 Axis Gyro, Acceleration, Magmetic"
P7 P9: "3A Straight Square Pins 2.5mm 6mm -40℃~+105℃ 1 7 3mm 2.54mm Black 1x7P Plugin,P=2.54mm  Pin Headers ROHS", LatestRevisionDate=17-Jul-2002, LatestRevisionNote="Re-released for DXP Platform.", Publisher="Altium Limited"
P8 P10: "3A Straight Square Pins 2.5mm 6mm -40℃~+105℃ 1 4 3mm 2.54mm Black 1x4P Plugin,P=2.54mm  Pin Headers ROHS", LatestRevisionDate=17-Jul-2002, LatestRevisionNote="Re-released for DXP Platform.", Publisher="Altium Limited"
P11 P12: "3A Straight Square Pins 2.5mm 6mm -40℃~+105℃ 1 12 3mm 2.54mm Black 1x12P Plugin,P=2.54mm  Pin Headers ROHS", LatestRevisionDate=17-Jul-2002, LatestRevisionNote="Re-released for DXP Platform.", Publisher="Altium Limited"
P13 P14 P15 P16: "1x6P XH 1 2.5mm 6 Brass Plugin,P=2.5mm  Wire To Board / Wire To Wire Connector ROHS", LatestRevisionDate=17-Jul-2002, LatestRevisionNote="Re-released for DXP Platform.", Publisher="Altium Limited"
R1 R2 R3 R5 R6: library part Res1, "100mW 50V ±1% ±100ppm/℃ -55℃~+155℃ 150kΩ 0603  Chip Resistor - Surface Mount ROHS", LatestRevisionDate=17-Jul-2002, LatestRevisionNote="Re-released for DXP Platform.", PackageDescription="Axial Device, Thru-Hole; 2 Leads; 0.3 in Pin Spacing", PackageReference=AXIAL-0.3, Published=8-Jun-2000, Publisher="Altium Limited"
R4: library part Res1, "Metal Oxide Resistors 12Ω 3W ±700ppm/℃ ±5% Axial Leaded  Through Hole Resistors ROHS", LatestRevisionDate=17-Jul-2002, LatestRevisionNote="Re-released for DXP Platform.", PackageDescription="Axial Device, Thru-Hole; 2 Leads; 0.3 in Pin Spacing", PackageReference=AXIAL-0.3, Published=8-Jun-2000, Publisher="Altium Limited"
S1: library part SW-SPST, "JNQ032 (Header) / 30A Short Connection Quick connect terminal Plugin  Cold-pressed?Terminals ROHS / ----- / RT-S02-113-R42BR (Switch) / Through Hole Rocker Switches ROHS", LatestRevisionDate=17-Jul-2002, LatestRevisionNote="Re-released for DXP Platform.", PackageDescription="Switch; 2 Leads", PackageReference=SPST-2, Published=24-Mar-1999, Publisher="Altium Limited"
S2: library part SW-SPDT, "Cylindrical button handle 125V -25℃~85℃ SPDT PCPin 40000 3A Plugin  Toggle Switches ROHS", ComponentLink1Description="Manufacturer Link", ComponentLink1URL=http://www.apem.com, DatasheetVersion=05-Dec-2000, LatestRevisionDate=17-Dec-2003, LatestRevisionNote="Schematic revised, PCB Footprint replaced.", PackageDescription="Switch; 4 Leads", PackageReference=TL36WW15050, Published=24-Mar-1999, Publisher="Altium Limited"
S3 S4: library part SW-SPST, "6.2mm 3.1mm Round Button 50mA Brick nogging 6.5mm SPST 12V SMD  Tactile Switches ROHS", LatestRevisionDate=17-Jul-2002, LatestRevisionNote="Re-released for DXP Platform.", PackageDescription="Switch; 2 Leads", PackageReference=SPST-2, Published=24-Mar-1999, Publisher="Altium Limited"
T1: library part "Non-isolated Voltage regulator", "XL4015E1 (Module) / Step-down type TO-263-5  DC-DC Converters ROHS / ----- / A2541HWV-2x2P (Header) / 2.54mm 2.54mm Gold Brass Straight 2x2P 4 2 Plugin,P=2.54mm  Female Headers ROHS"
T2: library part "Non-isolated Voltage regulator", "NO Step-down type 1 Step-down 1.25V~36V 8V~40V 8A 180kHz TO-220-5  DC-DC Converters ROHS"
T3: library part "Non-isolated Voltage regulator", "3A Non-isolated Voltage Regulator", ComponentLink1Description=buy_link, ComponentLink1URL=https://www.ruten.com.tw/item/show?21817939184609
U1 U2: "30V 10A 12mΩ@10V,8A 1.5W 2.5V@250μA 2 N-Channel SOP-8  MOSFETs ROHS"

## Free pads (board coordinates)
  rect 1.6x1.4 smd far side: 1(-6.535,-32.575) 1(-6.535,-30.075) 1(1.865,-32.575) 1(1.865,-30.075)
  rect 3.81x5.334 smd far side: 1(0.915,-50.263)
  rect 5.334x3.81 smd far side: 1(7.639,-80.314) 1(14.015,-87.807) 1(14.015,-80.314)
  rect 1.55x2.8 smd far side: 1(131.545,-23) 1(134.195,-23) 1(136.515,-23) 1(144.355,-23) 1(146.675,-23) 1(149.325,-23) 1(170.835,-35.425) 1(173.485,-35.425)
  rect 2.8x1.55 smd far side: 1(134.235,-40.575) 1(134.235,-37.925) 1(159.715,-24.16) 1(162.397,-58.213) 1(162.397,-55.563) 1(162.397,-53.243) 1(162.397,-50.593) 1(162.397,-48.053) 1(162.397,-45.403) 1(162.397,-43.083) 1(162.397,-40.433) 2(145.535,15.275) 2(145.535,17.925)
  rect 1.85x3.6 smd far side: 1(139.735,-38.225) 1(149.062,-56.218) 2(-0.603,-72.059) 2(-0.603,-66.809) 2(47.6,-40.25) 2(47.6,-24) 2(47.6,-18.75) 2(139.335,20.5) 2(139.335,15.25) 2(139.735,-43.475) 2(149.062,-50.968) 2(149.062,-38.253) 2(149.062,-33.003) 2(165.335,-26.825) 2(165.335,-21.575) 2(171.287,-45.048)
  rect 1.85x3.6 smd far side mask+0.075: 2(47.6,-45.5)
  rect 3.6x1.85 smd far side: 2(72.015,-58.575) 2(76.475,-43.05) 2(141.965,-9.665) 2(159.549,-9.665)
  rect 0.95x1 smd far side: 2(153.507,-54.718) 2(153.507,-36.753)

## Via types
v1: diameter 0.6, hole 0.3, Top Layer to Bottom Layer, tented both sides, 717 vias
v2: diameter 0.6, hole 0.3, Top Layer to Bottom Layer, 287 vias
v3: diameter 1.2, hole 0.6, Top Layer to Bottom Layer, 54 vias
v4: diameter 1.83, hole 1.83, Top Layer to Bottom Layer, tented both sides, 4 vias
v5: diameter 6, hole 3, Top Layer to Bottom Layer, 4 vias
v6: diameter 1.27, hole 0.6, Top Layer to Bottom Layer, tented both sides, 1 vias

## Nets (pads, with @x,y where several pads share a name; then routed paths per layer and width w, separated by ;. In a path a pad name is that pad's centre, name@x,y a point inside that pad or via, vN(x,y) a via of type N, cw(c..) or ccw(c..) an arc to the next point about the centre after c; other vN are vias at no path point)
A_12V: C17.2 C18.2 C19.1 C20.1 F2.2 P11.1 P11.2 P12.1 P12.2 pad.1@170.835,-35.425 pad.2@165.335,-26.825 R1.2 | length 307.2
  Top Layer w0.6: v1(26.635,-116.725) v3(26.635,-91.525) ; R1.2@37.923,-123.633 37.923,-123.621 38.635,-122.909 v1(38.635,-116.725)
  Top Layer w2: F2.2@7.639,-87.807 7.652,-87.82 v3(7.652,-91.49) ; v3(146.935,-91.525) v3(146.935,-71.225) ; v2(170.835,-36.175) v3(170.835,-26.825) ; C18.2@170.835,-35.425 170.835,-39.045 173.635,-41.845 v3(173.635,-71.225)
  Bottom Layer w0.6: v1(26.635,-116.725) v1(38.635,-116.725)
  Bottom Layer w2: v3(7.652,-91.49) 7.687,-91.525 v3(26.635,-91.525) v3(146.935,-91.525) ; v3(146.935,-71.225) v3(173.635,-71.225) ; P11.1@154.405,-26.81 v2(158.965,-26.81) 170.82,-26.81 v3(170.835,-26.825) v2(165.335,-26.825) ; P12.1@166.207,-35.353 pad.1@170.763,-35.353
  other v2: 170.835,-34.675 165.335,-28.041 160.465,-26.81 165.351,-25.61